# Altium PCB PCB1.pcbdoc
Units mil, origin at the board's own origin, x right, y up, seen from the top; angles counter-clockwise.
Board outline 2580 x 4195 mil, 2 copper layers (Top Layer, Bottom Layer); 17 components, 34 nets, 150 pads, 3 vias.
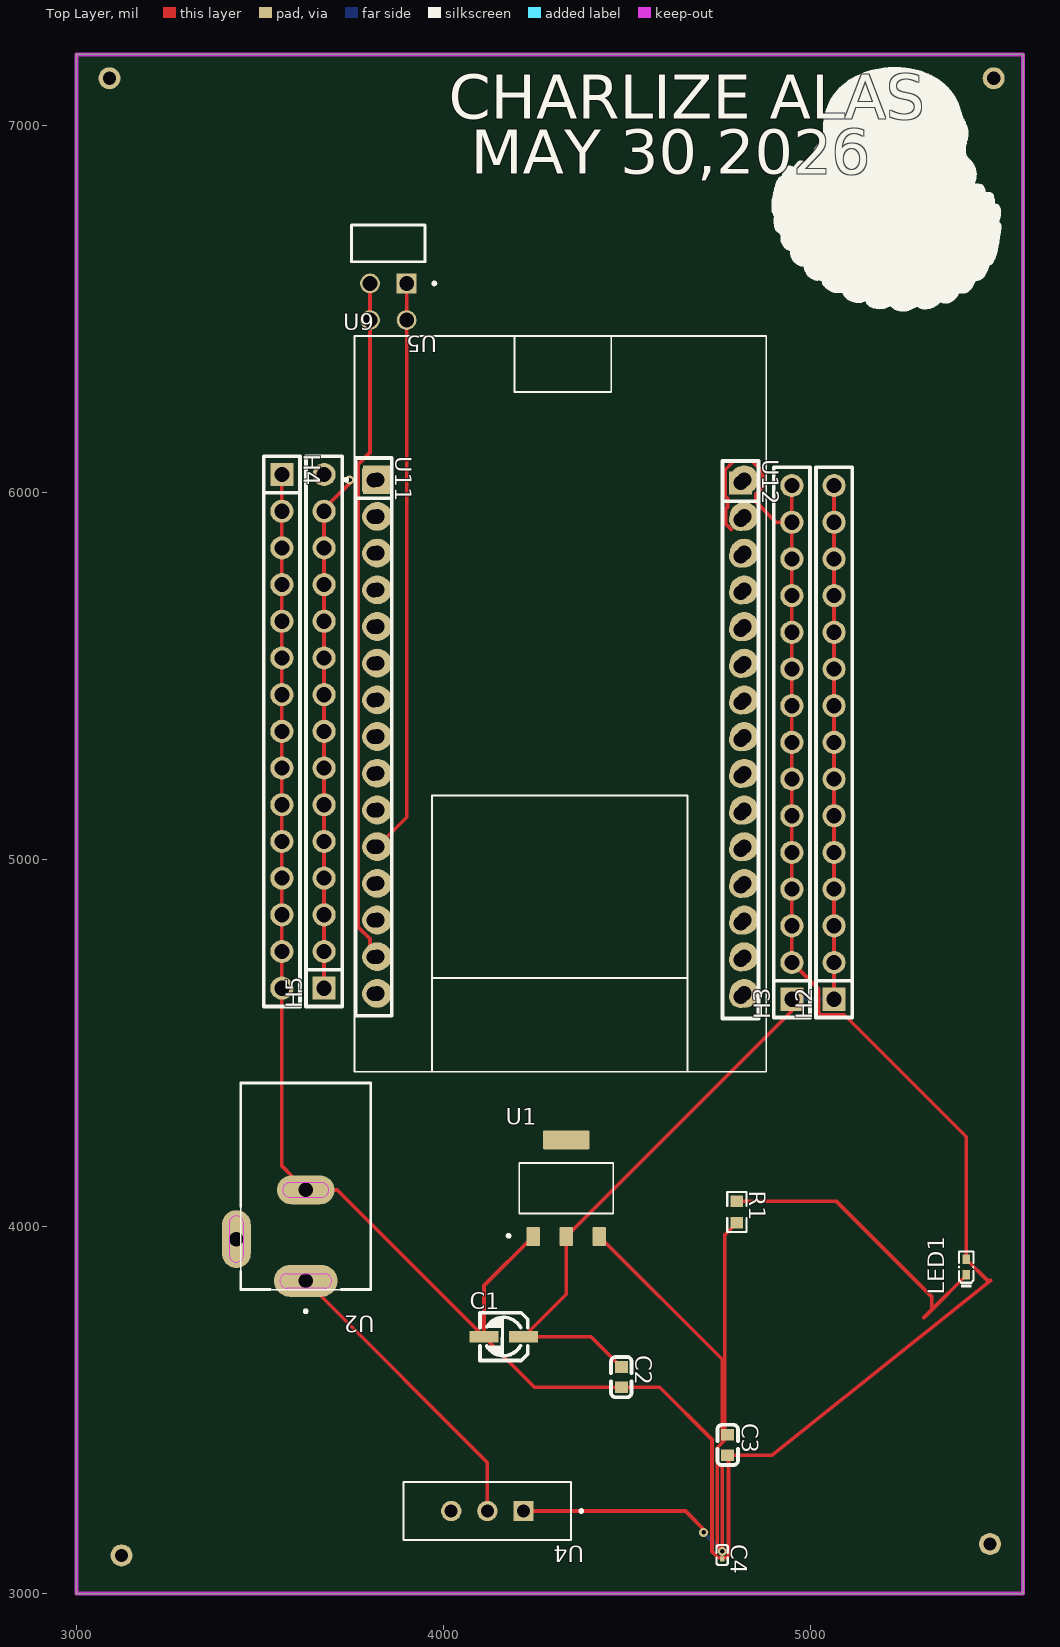
[diagram p0: Top Layer view]
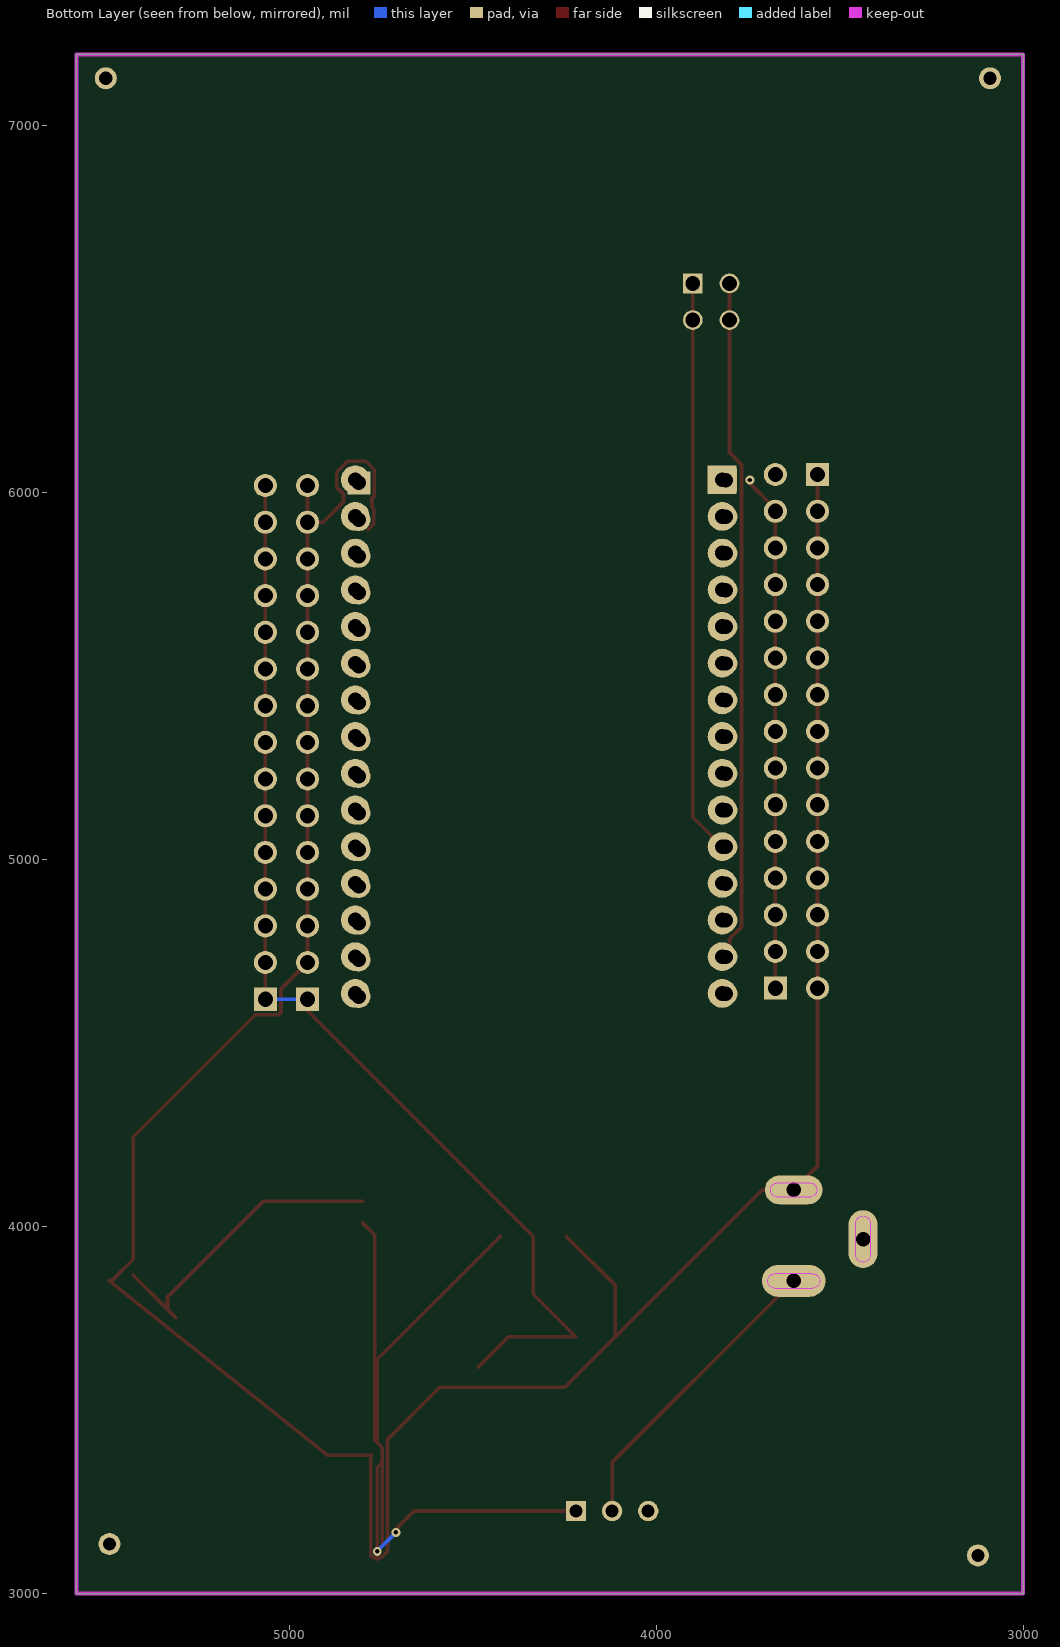
[diagram p1: Bottom Layer view, seen from below]

## Layer stack, top to bottom
Top Layer: signal copper (thickness not stored)
Dielectric: dielectric 12.6, FR-4, Dk 4.8
Bottom Layer: signal copper (thickness not stored)

## Board outline
3000,7195 5580,7195 5580,3000 3000,3000

## Design rules (kind name [scope] priority, off if disabled: settings)
BoardOutlineClearance copperThickness1oz [All] p0: genericclearance=10 ignorepadtopadclearanceinfootprint=FALSE except(0: Arc-SplitContinuation Track-SplitContinuation SMDPad-SplitContinuation THPad-SplitContinuation Via-SplitContinuation Fill-SplitContinuation Poly-SplitContinuation Region-SplitContinuation Text-SplitContinuation; 6: Track-CutoutEdge SMDPad-CutoutEdge THPad-CutoutEdge Via-CutoutEdge Region-CutoutEdge; 11.8: Track-OutlineEdge SMDPad-OutlineEdge THPad-OutlineEdge Via-OutlineEdge Fill-OutlineEdge Region-OutlineEdge Poly-OutlineEdge Text-OutlineEdge Fill-CutoutEdge)
BoardOutlineClearance copperThickness2oz [All] p0: genericclearance=10 ignorepadtopadclearanceinfootprint=FALSE except(0: Arc-SplitContinuation Track-SplitContinuation SMDPad-SplitContinuation THPad-SplitContinuation Via-SplitContinuation Fill-SplitContinuation Poly-SplitContinuation Region-SplitContinuation Text-SplitContinuation; 6: Track-CutoutEdge SMDPad-CutoutEdge THPad-CutoutEdge Via-CutoutEdge Region-CutoutEdge; 11.8: Track-OutlineEdge SMDPad-OutlineEdge THPad-OutlineEdge Via-OutlineEdge Fill-OutlineEdge Region-OutlineEdge Poly-OutlineEdge Text-OutlineEdge Fill-CutoutEdge)
Clearance copperThickness1oz [(InNet('+5V') OR InNet('GND') OR InNet('VCC') OR InNet('+3V3') OR InNet('$1N398') OR InNet('$1N407') OR InNet('D21') OR InNet('D22') OR InNet('3V3') OR InNet('D15') OR InNet('D2') OR InNet('D4') OR InNet('RX2') OR InNet('TX2') OR InNet('D5') OR InNet('D18') OR InNet('D19') OR InNet('RX0') OR InNet('TX0') OR InNet('D23') OR InNet('VIN') OR InNet('D13') OR InNet('D12') OR InNet('D14') OR InNet('D27') OR InNet('D26') OR InNet('D25') OR InNet('D33') OR InNet('D32') OR InNet('D35') OR InNet('D34') OR InNet('VN') OR InNet('VP') OR InNet('EN'))] p1: gap=7 ignorepadtopadclearanceinfootprint=FALSE except(4: Track-Track; 6: Track-SMDPad SMDPad-SMDPad Track-THPad SMDPad-THPad THPad-THPad Track-Via SMDPad-Via THPad-Via Via-Via SMDPad-Fill THPad-Fill Via-Fill Fill-Fill Track-Region SMDPad-Region THPad-Region Via-Region Region-Region Track-Poly SMDPad-Poly THPad-Poly Via-Poly Fill-Poly Region-Poly Poly-Poly Track-Text SMDPad-Text THPad-Text Via-Text Fill-Text Region-Text Poly-Text Text-Text; 6.9: Track-Hole SMDPad-Hole THPad-Hole Via-Hole Fill-Hole Region-Hole Poly-Hole Text-Hole Sheet-Hole; 11.8: Track-Fill Fill-Region Track-Sheet SMDPad-Sheet THPad-Sheet Via-Sheet Fill-Sheet Region-Sheet Poly-Sheet Text-Sheet)
Clearance copperThickness2oz [All] p1: gap=7 ignorepadtopadclearanceinfootprint=FALSE except(6: Track-SMDPad SMDPad-SMDPad Track-THPad SMDPad-THPad THPad-THPad Track-Via SMDPad-Via THPad-Via Via-Via SMDPad-Fill THPad-Fill Via-Fill Fill-Fill Track-Region SMDPad-Region THPad-Region Via-Region Region-Region Track-Poly SMDPad-Poly THPad-Poly Via-Poly Fill-Poly Region-Poly Poly-Poly Track-Text SMDPad-Text THPad-Text Via-Text Fill-Text Region-Text Poly-Text Text-Text; 6.9: Track-Hole SMDPad-Hole THPad-Hole Via-Hole Fill-Hole Region-Hole Poly-Hole Text-Hole Sheet-Hole; 8: Track-Track; 11.8: Track-Fill Fill-Region Track-Sheet SMDPad-Sheet THPad-Sheet Via-Sheet Fill-Sheet Region-Sheet Poly-Sheet Text-Sheet)
DiffPairsRouting differentialPair [All] p1: maxuncoupledlength=10 minlimit=6 maxlimit=6 mostfreqgap=6 toplayer_minwidth=5 toplayer_prefwidth=10 toplayer_maxwidth=100 bottomlayer_minwidth=5 bottomlayer_prefwidth=10 bottomlayer_maxwidth=100
PasteMaskExpansion pasteMaskExpansion [All] p1: expansion=0
PlaneConnect innerPlane [All] p1: planeconnectstyle=Relief reliefexpansion=20 reliefentries=4 reliefconductorwidth=10 reliefairgap=10
PolygonConnect copperRegion [All] p1: connectstyle=Relief reliefentries=4 reliefconductorwidth=10 polygonreliefangle="90 Angle" airgapwidth=10
RoutingVias viaSize [All] p1: viastyle="Through Hole" holewidth=12.0078 minholewidth=11.811 maxholewidth=248.0314 width=24.0158 minwidth=19.685 maxwidth=393.7008
SolderMaskExpansion solderMaskExpansion [All] p1: useseparateexpansions=TRUE expansion=2 expansionbottom=2
Width copperThickness1oz [All] p1: maxlimit=100 minlimit=5 preferedwidth=10
Width copperThickness2oz [All] p1: maxlimit=100 minlimit=8 preferedwidth=10

## Components (designator, comment, footprint, x,y, rotation, side; value= is the part's Value field where it differs from the comment)
C1 "C_Ele_SMD_3x5.4mm" CAP-SMD_BD3.0-L3.3-W3.3-RD 4165,3700 r0 top
C2 "CAP_0603" C0603 4485,3590 r270 top
C3 "CAP_0603" C0603 4775,3405 r270 top
C4 "CAP_0201" C0201 4760,3105 r270 top
H2 "2011-1X15G00SB" HDR-TH_15P-P2.54-V-M 5065,5320 r90 top
H3 "2011-1X15G00SB" HDR-TH_15P-P2.54-V-M 4950,5320 r90 top
H4 "2011-1X15G00SB" HDR-TH_15P-P2.54-V-M 3560,5350 r270 top
H5 "2011-1X15G00SB" HDR-TH_15P-P2.54-V-M 3675,5350 r90 top
LED1 "LED_0402-R" LED0402-RD_YELLOW 5425,3890 r90 top
R1 "Res_0603" R0603 4800,4040 r270 top
U1 "AMS1117-5.0" SOT229P700X180-4N 4335,4105 r0 top
U2 "DCJ200-10-A-XX-K_REVA" GCT_DCJ200-10-A-XX-K_REVA 3625,4110 r180 top
U4 "MINI-SPDT-SW" SW_MINI-SPDT-SW 4120,3225 r180 top
U5 "MTSW-102-10-L-D-472-RA" SAMTEC_MTSW-102-10-L-D-472-RA 3850,6680 r180 top
U9 "ESP32-DEVKIT-V1" MODULE_ESP32_DEVKIT_V1 4320,5425 r0 top
U11 "HX PM2.54-1x15P ZC" HDR-TH_15P-P2.54-V-F-1 3810,5335 r270 top
U12 "HX PM2.54-1x15P ZC" HDR-TH_15P-P2.54-V-F-1 4810.03,5327.22 r270 top

## Footprints (in the part's own frame and the unit in brackets; to place one, negate y for a bottom-side part, rotate by r counter-clockwise, add the part's x,y. Pads: shape width x height; smd on the part's side, far side on the other; paste and mask are expansions set on the pad)
C0201 [mil]
  rect 14.51x12.76 smd: 1(-10.8,0) 2(10.8,0)
  silkscreen extent -27,-15 27,15
C0603 [mm]
  rect 0.8x0.9 smd: 1(-0.7,0) 2(0.7,0)
  silkscreen extent -1.39,-0.71 1.39,0.71
CAP-SMD_BD3.0-L3.3-W3.3-RD [mm]
  rect 2x0.8 smd: 1(1.37,0) 2(-1.37,0)
  silkscreen extent -1.65,-1.64 1.65,1.66
GCT_DCJ200-10-A-XX-K_REVA [mm]
  oval 4.4x2.2 hole 1: 1(0,6.55)
  oval 4x2 hole 1: 2(0,0.25)
  oval 2x4 hole 1: 3(4.8,3.65)
  Board Outline Layer lines w0.003: 5.3,4.75 5.3,2.55 ; 5.3,4.75 5.3,2.55 ; 5.3,4.75 ccw(c4.8,4.75) 4.8,5.25 ; 5.3,4.75 ccw(c4.8,4.75) 4.8,5.25 ; 5.3,2.55 cw(c4.8,2.55) 4.8,2.05 ; 5.3,2.55 cw(c4.8,2.55) 4.8,2.05 ; 4.8,5.25 ccw(c4.8,4.75) 4.3,4.75 ; 4.8,5.25 ccw(c4.8,4.75) 4.3,4.75 ; 4.8,2.05 cw(c4.8,2.55) 4.3,2.55 ; 4.8,2.05 cw(c4.8,2.55) 4.3,2.55 ; 4.3,4.75 4.3,2.55 ; 4.3,4.75 4.3,2.55 ; 1.8,6.55 ccw(c1.3,6.55) 1.3,7.05 ; 1.8,6.55 ccw(c1.3,6.55) 1.3,7.05 ; 1.8,6.55 cw(c1.3,6.55) 1.3,6.05 ; 1.8,6.55 cw(c1.3,6.55) 1.3,6.05 ; 1.6,0.25 cw(c1.1,0.25) 1.1,-0.25 ; 1.6,0.25 cw(c1.1,0.25) 1.1,-0.25 ; 1.6,0.25 ccw(c1.1,0.25) 1.1,0.75 ; 1.6,0.25 ccw(c1.1,0.25) 1.1,0.75 ; 1.3,7.05 -1.3,7.05 ; 1.3,7.05 -1.3,7.05 ; 1.3,6.05 -1.3,6.05 ; 1.3,6.05 -1.3,6.05 ; 1.1,0.75 -1.1,0.75 ; 1.1,0.75 -1.1,0.75 ; 1.1,-0.25 -1.1,-0.25 ; 1.1,-0.25 -1.1,-0.25 ; -1.1,0.75 ccw(c-1.1,0.25) -1.6,0.25 ; -1.1,0.75 ccw(c-1.1,0.25) -1.6,0.25 ; -1.1,-0.25 cw(c-1.1,0.25) -1.6,0.25 ; -1.1,-0.25 cw(c-1.1,0.25) -1.6,0.25 ; -1.3,7.05 ccw(c-1.3,6.55) -1.8,6.55 ; -1.3,7.05 ccw(c-1.3,6.55) -1.8,6.55 ; -1.3,6.05 cw(c-1.3,6.55) -1.8,6.55 ; -1.3,6.05 cw(c-1.3,6.55) -1.8,6.55
  silkscreen extent -4.5,-7.15 4.5,8.75
HDR-TH_15P-P2.54-V-F-1 [mm]
  rect 1.6x1.575 hole 1: 1(-17.78,0)
  round 1.6 hole 1: 2(-15.24,0) 3(-12.7,0) 4(-10.16,0) 5(-7.62,0) 6(-5.08,0) 7(-2.54,0) 8(0,0) 9(2.54,0) 10(5.08,0) 11(7.62,0) 12(10.16,0) 13(12.7,0) 14(15.24,0) 15(17.78,0)
  silkscreen extent -19.3,-1.25 19.3,1.25
HDR-TH_15P-P2.54-V-M [mm]
  rect 1.6x1.6 hole 1.05: 1(-17.78,0)
  round 1.6 hole 1.05: 2(-15.24,0) 3(-12.7,0) 4(-10.16,0) 5(-7.62,0) 6(-5.08,0) 7(-2.54,0) 8(0,0) 9(2.54,0) 10(5.08,0) 11(7.62,0) 12(10.16,0) 13(12.7,0) 14(15.24,0) 15(17.78,0)
  silkscreen extent -19.05,-1.25 19.05,1.25
LED0402-RD_YELLOW [mm]
  rect 0.636x0.54 smd: 1(-0.538,0) 2(0.538,0)
  silkscreen extent -1.39,-0.54 1.09,0.54
MODULE_ESP32_DEVKIT_V1 [mm]
  rect 2x2 hole 1.02: 1(-12.7,15.515)
  round 2 hole 1.02: 2(-12.7,12.975) 3(-12.7,10.435) 4(-12.7,7.895) 5(-12.7,5.355) 6(-12.7,2.815) 7(-12.7,0.275) 8(-12.7,-2.265) 9(-12.7,-4.805) 10(-12.7,-7.345) 11(-12.7,-9.885) 12(-12.7,-12.425) 13(-12.7,-14.965) 14(-12.7,-17.505) 15(-12.7,-20.045) 16(12.7,-20.045) 17(12.7,-17.505) 18(12.7,-14.965) 19(12.7,-12.425) 20(12.7,-9.885) 21(12.7,-7.345) 22(12.7,-4.805) 23(12.7,-2.265) 24(12.7,0.275) 25(12.7,2.815) 26(12.7,5.355) 27(12.7,7.895) 28(12.7,10.435) 29(12.7,12.975) 30(12.7,15.515)
  silkscreen extent -14.95,-25.48 14.23,25.48
R0603 [mil]
  rect 31.75x34.02 smd: 1(-29.66,0) 2(29.66,0)
  silkscreen extent -55,-26 55,26
SAMTEC_MTSW-102-10-L-D-472-RA [mm]
  rect 1.37x1.37 hole 1.02: 01(-1.27,2.77)
  round 1.37 hole 1.02: 02(-1.27,5.31) 03(1.27,2.77) 04(1.27,5.31)
  silkscreen extent -3.29,-1.27 2.54,2.87
SOT229P700X180-4N [mm]
  rrect15% 0.93x1.31 smd: 1(-2.29,-3.345) 2(0,-3.345) 3(2.29,-3.345)
  rrect15% 3.24x1.31 smd: 4(0,3.345)
  silkscreen extent -4.09,-3.4 3.25,1.75
SW_MINI-SPDT-SW [mm]
  rect 1.408x1.408 hole 0.9: 1(-2.5,0)
  round 1.408 hole 0.9: 2(0,0) 3(2.5,0)
  silkscreen extent -6.6,-2 5.8,2

## Free pads (board coordinates)
  round 60 hole 36: 1(3090,7130) 1(5500,7130) 3(5490,3135) 4(3122.98,3104)

## Via types
v1: diameter 24.02, hole 12.01, Top Layer to Bottom Layer, 3 vias

## Nets (pads, with @x,y where several pads share a name; then routed paths per layer and width w, separated by ;. In a path a pad name is that pad's centre, name@x,y a point inside that pad or via, vN(x,y) a via of type N, cw(c..) or ccw(c..) an arc to the next point about the centre after c; other vN are vias at no path point)
3V3: U9.1
$1N398: LED1.1 R1.1 | length 838
  Top Layer w10: R1.1 5070.22,4069.66 5331.61,3808.27 5331.61,3774.11 ; 5310,3752.5 5331.61,3774.11 ; LED1.1 5425,3867.5 5331.61,3774.11
$1N407: U2.1 U4.2 | length 780.5
  Top Layer w10: U2.1@3661.5,3815.63 4120,3357.13 U4.2
+3V3: H5.1 H5.2 H5.3 H5.4 H5.5 H5.6 H5.7 H5.8 H5.9 H5.10 H5.11 H5.12 H5.13 H5.14 H5.15 U11.1 | length 1417.5
  Top Layer w10: H5.1 H5.2 H5.3 H5.4 H5.5 H5.6 H5.7 H5.8 H5.9 H5.10 H5.11 H5.12 H5.13 3675,5956.5 v1@3753.5,6035
  other v1: 3744.53,6035
+5V: C1.1 C2.1 H2.1 H2.2 H2.3 H2.4 H2.5 H2.6 H2.7 H2.8 H2.9 H2.10 H2.11 H2.12 H2.13 H2.14 H2.15 H3.1 U1.2 U12.1 | length 3038
  Top Layer w10: C2.1 4402.56,3700 C1.1 4335,3816.06 U1.2 4950,4588.31 H3.1 ; H2.1 H2.2 H2.3 H2.4 H2.5 H2.6 H2.7 H2.8 H2.9 H2.10 H2.11 H2.12 H2.13 H2.14 H2.15
  Bottom Layer w10: H3.1 H2.1
D2: U9.4 U11.4
D4: U9.5 U11.5
D5: U9.8 U11.8
D12: U9.27 U12.4
D13: U9.28 U12.3
D14: U9.26 U12.5
D15: U9.3 U11.3
D18: U9.9 U11.9
D19: U9.10 U11.10
D21: U5.01 U5.02 U9.11 U11.11 | length 1568.3
  Top Layer w10: U9.11 3900,5115.83 U5.02 U5.01
D22: U5.03 U5.04 U9.14 U11.14 | length 1867
  Top Layer w10: U5.03 U5.04 3800,6110.1 3767.52,6077.62 3767.52,4817.1 3800,4784.61 3800,4745 U11.14
D23: U9.15 U11.15
D25: U9.23 U12.8
D26: U9.24 U12.7
D27: U9.25 U12.6
D32: U9.21 U12.10
D33: U9.22 U12.9
D34: U9.19 U12.12
D35: U9.20 U12.11
EN: U9.16 U12.15
GND: C1.2 C2.2 C3.2 C4.2 H3.2 H3.3 H3.4 H3.5 H3.6 H3.7 H3.8 H3.9 H3.10 H3.11 H3.12 H3.13 H3.14 H3.15 H4.1 H4.2 H4.3 H4.4 H4.5 H4.6 H4.7 H4.8 H4.9 H4.10 H4.11 H4.12 H4.13 H4.14 H4.15 LED1.2 U1.1 U2.2 U11.2 U12.2 | length 8031.3
  Top Layer w10: H4.1 H4.2 H4.3 H4.4 H4.5 H4.6 H4.7 H4.8 H4.9 H4.10 H4.11 H4.12 H4.13 H4.14 H4.15 3560,4165.16 U2.2@3588.5,4136.65 ; U2.2 U2.2@3625,4103.03 ; 3704.8,4100.16 3710.91,4100.16 C1.2 ; U1.1 4111.06,3839.53 C1.2 ; C4.2 C4.2@4763.36,3097.56 ; 4784.39,5900.22 4769.65,5914.97 4769.65,5956.68 4774.48,5961.52 4774.48,5984.74 4768.05,5991.17 4768.05,6063.26 4790.96,6086.18 4840.86,6086.18 4870.35,6056.68 4870.35,6014.97 4852.02,5996.63 4852.02,5975.02 4907.04,5920 H3.14 ; H3.15 H3.14 ; C1.2 4248.62,3562.44 C2.2 4590,3562.44 4732.28,3420.16 4732.28,3114.35 4749.07,3097.56 C4.2@4763.36,3097.56 ; C4.2@4763.36,3097.56 4770.93,3097.56 4777.36,3104 4777.36,3375.08 C3.2 4896.25,3377.44 5492.24,3853.28 5482.91,3853.28 LED1.2 5425,4245 5092.48,4577.52 5028.95,4577.52 5022.52,4583.95 5022.52,4647.48 H3.2 H3.3 H3.4 H3.5 H3.6 H3.7 H3.8 H3.9 H3.10 H3.11 H3.12 H3.13 H3.14
RX0: U9.12 U11.12
RX2: U9.6 U11.6
TX0: U9.13 U11.13
TX2: U9.7 U11.7
VCC: C3.1 C4.1 R1.2 U1.3 U4.1 | length 2467.6
  Top Layer w10: U4.1 4660,3225 v1@4718.27,3166.73 ; U1.3 4760,3638.46 4760,3411.44 ; v1(4760,3115) C4.1 ; R1.2 4767.07,3977.41 4767.07,3418.51 4760,3411.44 ; 4746.3,3357.14 4760,3343.44 C4.1 ; 4746.3,3357.14 4746.3,3397.74 4760,3411.44 ; 4746.3,3357.14 4746.3,3129.5 C4.1
  Bottom Layer w10: v1(4709.29,3166.73) 4760,3116.02 v1(4760,3115)
VIN: U9.30
VN: U9.18 U12.13
VP: U9.17 U12.14
pads on no net: U1.4 U2.3 U4.3 U9.2 U9.29

## Keep-outs
Board Outline Layer:
  the board outline again, w10

## Silkscreen, mask and mechanical layers (free items; w line width, h text height)
Top Silkscreen Layer:
  drawing of 154 lines, arcs and shapes, not listed
  text "CHARLIZE ALAS" at 4015,7020 h120
  text "MAY 30,2026" at 4075,6870 h120